# Altium PCB Ultrasonic main.PcbDoc
Units mm, origin at the board's own origin, x right, y up, seen from the top; angles counter-clockwise.
Board outline 47.8 x 79.1 mm, 2 copper layers (Top Layer, Bottom Layer), stack 1.621 mm thick; 35 components, 34 nets, 151 pads, 6 vias.
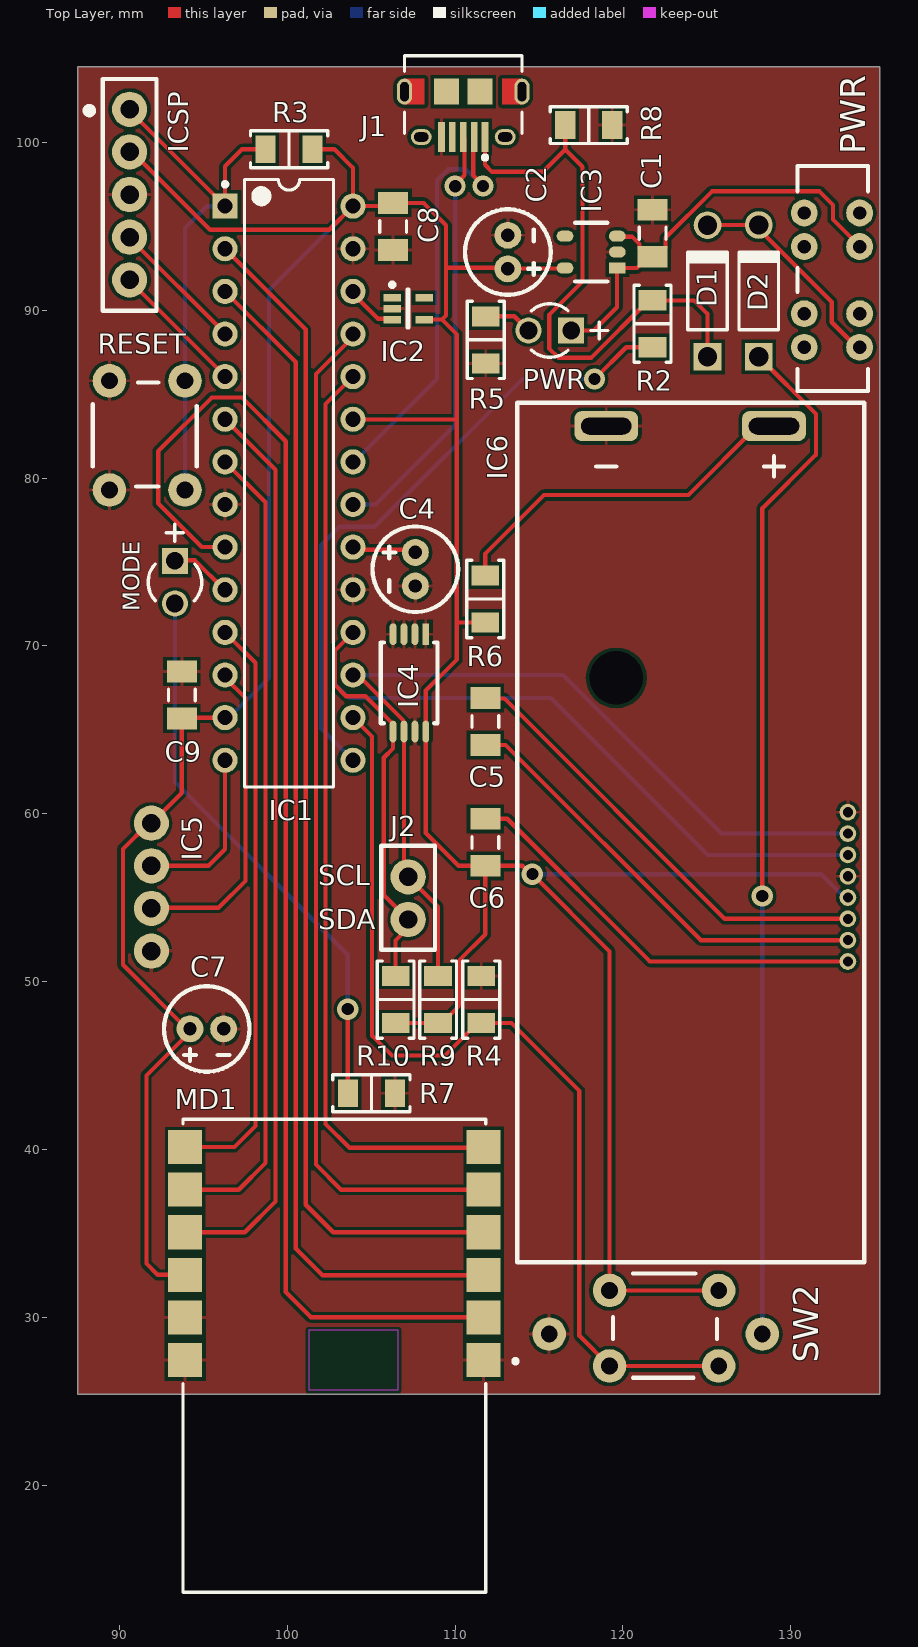
[diagram p0: Top Layer view]
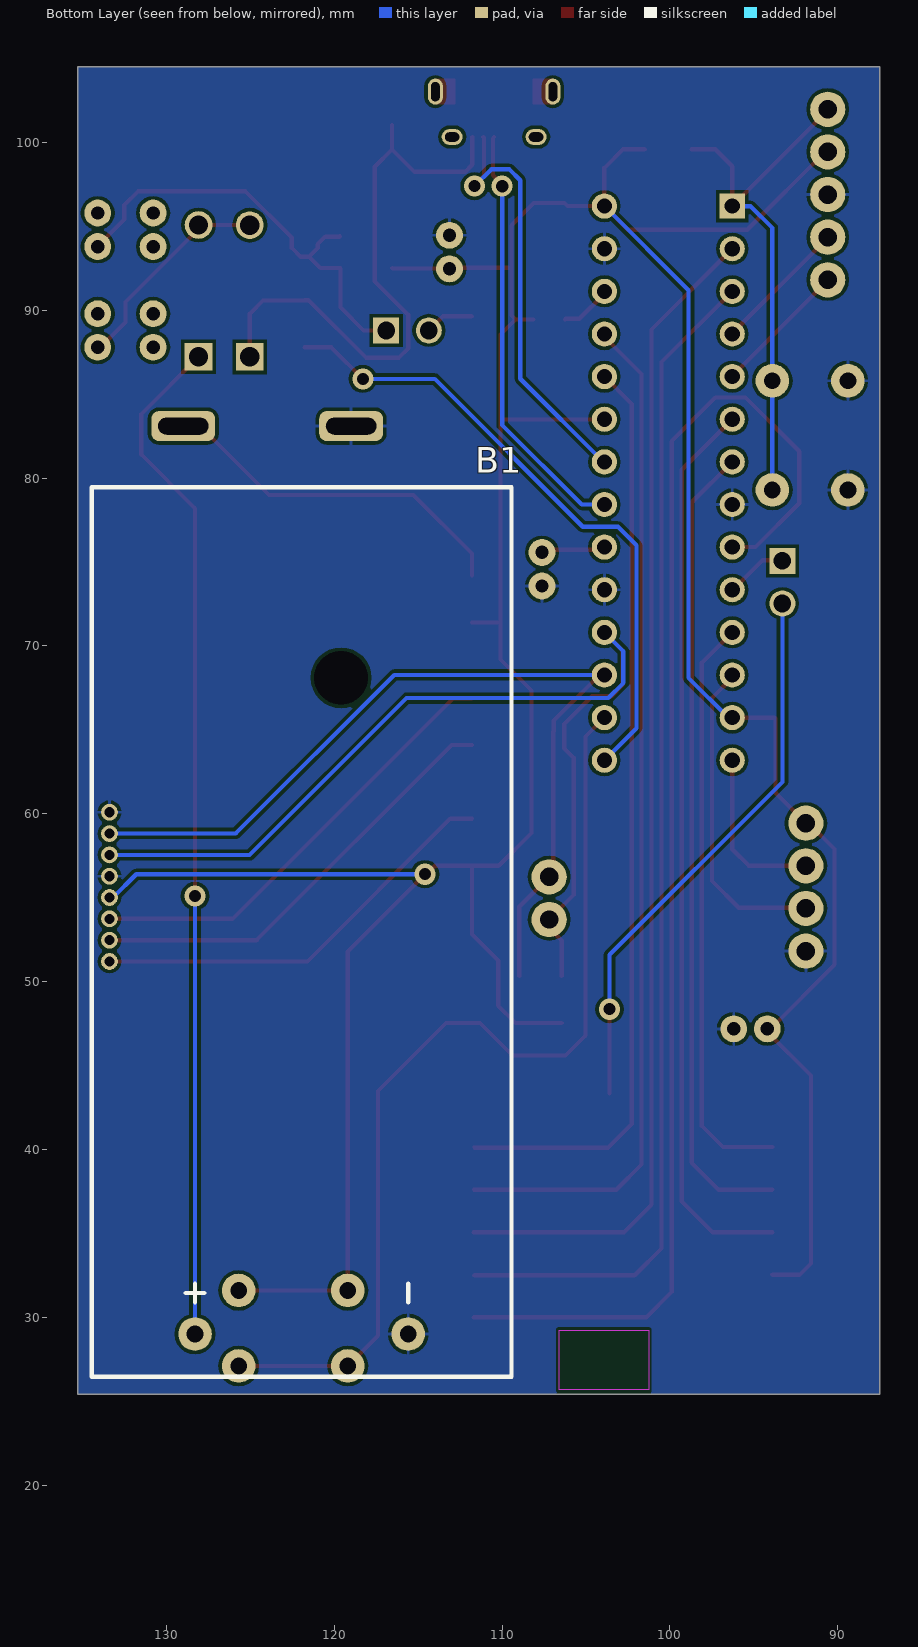
[diagram p1: Bottom Layer view, seen from below]

## Layer stack, top to bottom
Top Solder: solder mask 0.0102, Solder Resist, Dk 3.5
Top Layer: signal copper 0.0356
Dielectric 1: dielectric 1.55, FR-4, Dk 4.8
Bottom Layer: signal copper 0.0356
Bottom Solder: solder mask 0.0102, Solder Resist, Dk 3.5

## Board outline
87.5,25.4 135.3,25.4 135.3,104.5 87.5,104.5

## Design rules (kind name [scope] priority, off if disabled: settings)
BoardOutlineClearance [All] p1 off: gap=0.25 ignorepadtopadclearanceinfootprint=FALSE except(0: Arc-SplitContinuation Track-SplitContinuation SMDPad-SplitContinuation THPad-SplitContinuation Via-SplitContinuation Fill-SplitContinuation Poly-SplitContinuation Region-SplitContinuation Text-SplitContinuation)
Clearance Clearance-xPP-xTP-xTT [All] p1: gap=0.2 ignorepadtopadclearanceinfootprint=FALSE except(0: Arc-Hole Track-Hole SMDPad-Hole THPad-Hole Via-Hole Fill-Hole Poly-Hole Region-Hole Text-Hole; 0.25: Arc-Arc Arc-Track Track-Track)
ComponentClearance [All] p1: gap=0.25 collisioncheckmode=3 verticalgap=0.25 showdistances=FALSE
DiffPairsRouting DiffPair_DiffPairsRouting [InDifferentialPair ('D')] p1: maxlimit=20 minlimit=0.254 mostfreqgap=0.254 toplayer_minwidth=0.381 toplayer_maxwidth=0.381 toplayer_prefwidth=0.381 bottomlayer_minwidth=0.381 bottomlayer_maxwidth=0.381 bottomlayer_prefwidth=0.381 maxuncoupledlength=12.7
DiffPairsRouting DiffPair_DiffPairsRouting_1 [InDifferentialPair ('D')] p2: maxlimit=0.254 minlimit=0.254 mostfreqgap=0.254 toplayer_minwidth=0.254 toplayer_maxwidth=0.381 toplayer_prefwidth=0.254 bottomlayer_minwidth=0.254 bottomlayer_maxwidth=0.381 bottomlayer_prefwidth=0.254 maxuncoupledlength=12.7
DiffPairsRouting DiffPairsRouting_1 [InDifferentialPair ('D')] p3: maxlimit=0.254 minlimit=0.254 mostfreqgap=0.254 toplayer_minwidth=0.381 toplayer_maxwidth=0.381 toplayer_prefwidth=0.381 bottomlayer_minwidth=0.381 bottomlayer_maxwidth=0.381 bottomlayer_prefwidth=0.381 maxuncoupledlength=12.7
DiffPairsRouting [All] p4: maxlimit=0.25 minlimit=0.25 mostfreqgap=0.25 toplayer_minwidth=0.381 toplayer_maxwidth=0.381 toplayer_prefwidth=0.381 bottomlayer_minwidth=0.381 bottomlayer_maxwidth=0.381 bottomlayer_prefwidth=0.381 maxuncoupledlength=12.5
Height [All] p1: minheight=0 maxheight=25 prefheight=12.5
HoleSize HoleSize-PTH [All] p1: absolutevalues=TRUE maxlimit=5 minlimit=0.25 maxpercent=80.000 minpercent=20.000
HoleToHoleClearance [All] p1: gap=0.35 allowstackedmicrovias=TRUE
MatchedLengths DiffPair_MatchedLengths [InDifferentialPair ('D')] p1: tolerance=25.4 checknetsindiffpair=FALSE checkdiffpairvsdiffpair=TRUE checkxsignals=TRUE checkothers=TRUE
MatchedLengths DiffPair_MatchedLengths_1 [InDifferentialPair ('D')] p2: tolerance=25.4 checknetsindiffpair=FALSE checkdiffpairvsdiffpair=TRUE checkxsignals=TRUE checkothers=TRUE
MatchedLengths [InDifferentialPair ('D')] p3: tolerance=25.4 checknetsindiffpair=FALSE checkdiffpairvsdiffpair=TRUE checkxsignals=TRUE checkothers=TRUE
MinimumAnnularRing "Minimum IAR  >0.45mm" [((ObjectKind = 'Pad') OR (ObjectKind = 'Via')) And (Layer = 'MultiLayer') And (HoleDiameter > AsMM(0.45))] p1: minimumring=0.175 // minimum inner annular ring for pads > 0.45mm finished hole size
MinimumAnnularRing "Minimum IAR <=0.45mm" [((ObjectKind = 'Pad') OR (ObjectKind = 'Via')) And (Layer = 'MultiLayer') And (HoleDiameter <= AsMM(0.45))] p2: minimumring=0.175 // minimum inner annular ring for pads <= 0.45mm finished hole size
MinimumSolderMaskSliver [All] p1: minsoldermaskwidth=0.08
PlaneClearance PlaneClearance-IPI [All] p1: clearance=0.25
PlaneConnect [All] p1: planeconnectstyle=Relief reliefexpansion=0.175 reliefentries=4 reliefconductorwidth=0.2 reliefairgap=0.2
PolygonConnect PolygonConnect-xTW [All] p1: connectstyle=Relief reliefconductorwidth=0.2 reliefentries=4 polygonreliefangle="90 Angle" airgapwidth=0.2
RoutingCorners [All] p1: cornerstyle=45-Degree minsetback=2.5 maxsetback=2.5
RoutingVias "RoutingVias > 0.45mm" [(ObjectKind = 'Via') And (HoleDiameter > AsMM(0.45))] p1: holewidth=0.5 width=0.85 viastyle="Through Hole" minholewidth=0.5 minwidth=0.85 maxholewidth=0.9 maxwidth=1.25 // finishet hole size > 0.45mm
RoutingVias "RoutingVias <= 0.45mm" [(ObjectKind = 'Via') And (HoleDiameter <= AsMM(0.45))] p2: holewidth=0.3 width=0.65 viastyle="Through Hole" minholewidth=0.25 minwidth=0.6 maxholewidth=0.45 maxwidth=0.8 // finishet hole size <= 0.45mm
SilkToSilkClearance [All] p1: silktosilkclearance=0.2
SilkToSolderMaskClearance SilkscreenOverComponentPads [IsPad] p1: minsilkscreentomaskgap=0.1 clearancetoexposedcopper=TRUE
SolderMaskExpansion [All] p1: expansion=0 istentingtop=FALSE
UnRoutedNet [All] p1: checkbadconnections=TRUE
Width Width-xTW [All] p1: maxlimit=1.5 minlimit=0.15 preferedwidth=0.2
18 further rules are at their usual default settings.

## Classes and differential pairs
differential pair D: +D_P -D_N

## Components (designator, comment, footprint, x,y, rotation, side; value= is the part's Value field where it differs from the comment)
B1 "BAT" MP000342 115.6,29 r270 bottom
C1 "1uF" 1206 121.76,94.59 r270 top
C2 "100uF" "THT CAP POL 5mm" 113.14,92.47 r90 top
C4 "10uF" "THT CAP POL 5mm" 107.628,75.573 r270 top
C5 "1uF" 1206 111.8,65.5 r270 top
C6 "1uF" 1206 111.8,58.3 r90 top
C7 "10uF" "THT CAP POL 5mm" 94.2,47.182 r0 top
C8 "0.1uF" 1206 106.3,95 r90 top
C9 "0.1uF" 1206 93.715,67.085 r270 top
D1 "1N5817" DIOD-DO-41-P-2 125.04,91.15 r90 top
D2 "1N5817" DIOD-DO-41-P-2 128.09,91.16 r90 top
IC1 "PIC24FJ64GB002-I/SP" SPDIP300-SP28 100.1,79.7 r0 top
IC2 "MCP9700T-E/LT" SC70-LT5_M 107.2,90.1 r0 top
IC3 "MIC5365-3.3YD5-TR" TSOT-23-5 119.66,92.52 r180 top
IC4 "M24256-BRDW6TP" "TSSOP8 DW" 108.25,70.7 r270 top
IC5 "RCWL1601" RCWL-1601 91.9,59.44 r270 top
IC6 "MCCOG21605B6W-SPTLYI" "LCD MCCOG21605B6W-SPTLYI" 133.4,51.2 r90 top
ICSP "5 PIN CON" "5 PIN CON" 90.6,101.98 r270 top (schematic designator J3)
J1 "10118194-0001LF" FCI-10118194-0001LF-5_V 110.48,101.68 r180 top
J2 "2 PIN CON" "2 PIN CON" 107.2,53.7 r90 top
MD1 "MRF89XAM8A-I/RM" FP-MRF89XAM8A-I-RM-0 102.8,27.7 r180 top
MODE "MODE" KING-L-934GD 93.3,73.8 r270 top (schematic designator LED2)
PWR "STSSS2232" STSSS2232 130.8,87.8 r90 top (schematic designator SW3)
PWR "PWR" KING-L-934GD 115.64,88.8 r180 top (schematic designator LED1)
R2 "100k" "RES 1206_3216" 121.76,89.2 r270 top value="100 kOhms"
R3 "10k" "RES 1206_3216" 100.1,99.6 r0 top value="10 kOhms"
R4 "1k" "RES 1206_3216" 111.55,48.93 r270 top value="100 kOhms"
R5 "220" "RES 1206_3216" 111.82,88.24 r90 top value="1 MOhms"
R6 "100" "RES 1206_3216" 111.8,72.8 r270 top value="1 MOhms"
R7 "100" "RES 1206_3216" 105.01,43.35 r180 top value="1 MOhms"
R8 "100k" "RES 1206_3216" 117.96,101.04 r180 top value="10 kOhms"
R9 "4k7" "RES 1206_3216" 108.98,48.93 r90 top value="4.7 kOhms"
R10 "4k7" "RES 1206_3216" 106.45,48.93 r270 top value="4.7 kOhms"
RESET "RESET" FSM4JH 89.4,79.3 r90 top (schematic designator SW1)
SW2 "MEASURE" FSM4JH 119.2,31.6 r0 top

## Footprints (in the part's own frame and the unit in brackets; to place one, negate y for a bottom-side part, rotate by r counter-clockwise, add the part's x,y. Pads: shape width x height; smd on the part's side, far side on the other; paste and mask are expansions set on the pad)
"2 PIN CON" [mm]
  round 2.1 hole 1.1 mask+0.1: 1(0,0)
  round 2.1 hole 1.1 mask+0.102: 2(2.54,0)
  silkscreen extent -1.8,-1.6 4.4,1.6, body extent -1.2,-1.2 3.74,1.2, height 5.5
"5 PIN CON" [mm]
  round 2.1 hole 1.1 mask+0.102: 1(0,0) 2(2.54,0) 3(5.08,0) 4(7.62,0) 5(10.16,0)
  silkscreen extent -1.8,-1.6 12,1.6, body extent -1.2,-1.2 11.36,1.2, height 5.5
1206 [mm] "Chip Resistor, 2-Leads, Body 3.20x1.60mm, IPC Medium Density"
  rect 1.3x1.8 smd: 1(-1.4,0) 2(1.4,0)
  silkscreen extent -0.35,-0.8 0.35,0.8, body extent -1.7,-0.9 1.7,0.9, height 0.9
DIOD-DO-41-P-2 [mm] "THD, 2-Leads, Body 4.635x2.36mm, Pin Spacing 7.85mm"
  rect 1.65x1.65 hole 1.15: 1(-3.925,0)
  round 1.65 hole 1.15: 2(3.925,0)
  silkscreen extent -2.32,-1.18 2.32,1.18, body extent -4.36,-1.18 4.36,1.18, height 2.35
FCI-10118194-0001LF-5_V [mm] "SMD, 5-Leads, Body 7x5mm, Pitch 0.65 mm"
  rect 0.4x1.8 smd: 1(-1.3,1.35) 2(-0.65,1.35) 3(0,1.35) 4(0.65,1.35) 5(1.3,1.35)
  oval 1.25x0.95 hole 0.55 slot 0.85 at 0 deg: 6(-2.5,1.35) 7(2.5,1.35)
  oval 0.9x1.55 hole 0.5 slot 1.15 at 90 deg: 8(-3.5,-1.35) 9(3.5,-1.35)
  rect 1.5x1.55 smd: 10(-1,-1.35) 11(1,-1.35)
  Top Layer region: 3.5,-2.125 3.5,-0.575 2.3,-0.575 2.3,-2.125
  Top Layer region: -2.3,-2.125 -2.3,-0.575 -3.5,-0.575 -3.5,-2.125
  silkscreen extent -3.5,-3.5 3.5,2.7, body extent -4.02,-4.03 4.02,1.55, height 2.72
FP-MRF89XAM8A-I-RM-0 [mil]
  rect 80x80 smd paste+0 mask+0: 1(-350,10) 2(-350,-90) 3(-350,-190) 4(-350,-290) 5(-350,-390) 6(-350,-490) 7(350,-490) 8(350,-390) 9(350,-290) 10(350,-190) 11(350,-90) 12(350,10)
  Keep-Out Layer region: -150,-60 60,-60 60,80 -150,80
  silkscreen extent -430,-555 355,555, body extent -394,-559 394,559, height 10
FSM4JH [mm] "Tactile switch"
  round 2 hole 1: 1(0,0) 2(6.5,0) 3(0,-4.5) 4(6.5,-4.5)
  silkscreen extent 0.2,-5.2 6.4,1, body extent 0.3,-5.1 6.3,0.9, height 5.5
KING-L-934GD [mm] "THD, 2-Leads, Dia 3.2mm, Body Length 4.9mm"
  rect 1.55x1.55 hole 1.05: 1(-1.27,0)
  round 1.55 hole 1.05: 2(1.27,0)
  silkscreen extent -3.46,-1.6 1.1,1.6
"LCD MCCOG21605B6W-SPTLYI" [mm] "16x2"
  round 1 hole 0.6 mask+0.05: 1(0,0) 2(1.27,0) 3(2.54,0) 4(3.81,0) 5(5.08,0) 6(6.35,0) 7(7.62,0) 8(8.89,0)
  rrect50% 1.8x3.8 hole 1 slot 3 at 90 deg mask+0.102: 9(31.9,4.4) 10(31.9,14.4)
  silkscreen extent -17.92,-0.98 33.3,19.7
MP000342 [mm] "Battery holder 2xAAA"
  round 2 hole 1 mask+0.102: 1(0,0) 2(0,-12.7)
  round 0 hole 3.2 unplated mask+0.102: 3(-39.1,-4)
  silkscreen extent -50.45,-18.85 2.55,6.15, body extent -50,-18.5 2,5.5, height 12
RCWL-1601 [mm] "Ultrasonic distance sensor"
  round 2.1 hole 1.1 mask+0.102: 1(0,0) 2(2.54,0) 3(5.08,0) 4(7.62,0)
  body extent -16.2,-9.1 23.8,0.5, height 18
"RES 1206_3216" [mm] "Chip Resistor, 2-Leads, Body 3.13x1.55mm, IPC Medium Density"
  rect 1.2x1.65 smd: 1(-1.4,0) 2(1.4,0)
  silkscreen extent -2.3,-1.1 2.3,1.1, body extent -1.57,-0.8 1.62,0.8, height 0.6
SC70-LT5_M [mm] "SOT353, 5-Leads, Body 2x1.3mm, Pitch 0.65mm, Lead Span 2.1mm, IPC Low Density"
  rect 1.05x0.45 smd: 1(-0.95,0.65) 2(-0.95,0) 3(-0.95,-0.65) 4(0.95,-0.65) 5(0.95,0.65)
  silkscreen extent -1.07,-1.15 0.05,1.55, body extent -0.67,-1.12 0.68,1.13, height 1.1
SPDIP300-SP28 [mm] "DIP, 28-Pin, Row Spacing 7.62 mm, Pitch 2.54 mm"
  rect 1.5x1.5 hole 0.9: 1(-3.81,16.51)
  round 1.5 hole 0.9: 2(-3.81,13.97) 3(-3.81,11.43) 4(-3.81,8.89) 5(-3.81,6.35) 6(-3.81,3.81) 7(-3.81,1.27) 8(-3.81,-1.27) 9(-3.81,-3.81) 10(-3.81,-6.35) 11(-3.81,-8.89) 12(-3.81,-11.43) 13(-3.81,-13.97) 14(-3.81,-16.51) 15(3.81,-16.51) 16(3.81,-13.97) 17(3.81,-11.43) 18(3.81,-8.89) 19(3.81,-6.35) 20(3.81,-3.81) 21(3.81,-1.27) 22(3.81,1.27) 23(3.81,3.81) 24(3.81,6.35) 25(3.81,8.89) 26(3.81,11.43) 27(3.81,13.97) 28(3.81,16.51)
  silkscreen extent -3.93,-18.1 2.65,18.1, body extent -3.55,-18.1 3.55,18.1, height 5.33
STSSS2232 [mm] "Slide switch 3POS"
  round 1.6 hole 0.8 mask+0.102: 1(0,-3.3) 2(2,-3.3) 3(6,-3.3) 4(8,-3.3) 5(0,0) 6(2,0) 7(6,0) 8(8,0)
  silkscreen extent -2.6,-3.8 10.8,0.4, body extent -2.4,-5.4 10.6,0.3, height 3.5
"THT CAP POL 5mm" [mm]
  round 1.6 hole 0.8 mask+0.102: 1(0,0) 2(2,0)
  silkscreen extent -1.55,-2.55 3.55,2.55, body extent -1.5,-2.5 3.5,2.5, height 8.5
TSOT-23-5 [mm]
  rect 1x0.66 smd: 1(0,0)
  oval 1x0.66 smd: 2(0,-0.95) 3(0,-1.9) 4(3.115,-1.9) 5(3.115,0)
  silkscreen extent 0.6,-2.7 2.5,0.8, body extent 0.65,-2.4 2.45,0.5, height 1
"TSSOP8 DW" [mm]
  rect 1.3x0.4 smd: 1(0,0)
  oval 1.3x0.4 smd: 2(0,-0.65) 3(0,-1.3) 4(0,-1.95) 5(5.8,-1.95) 6(5.8,-1.3) 7(5.8,-0.65) 8(5.8,0)
  silkscreen extent 0.49,-2.69 5.3,0.7, body extent 0.7,-2.5 5.1,0.5, height 1.2

## Part data
C1 C5 C6 C8 C9: library part MCGPR50V105M5X11, "MCGPR50V105M5X11"
C2 C4 C7: library part "CAP POL", "Capacitor"
D1 D2: library part CMP-2000-05521-1, "Schottky Barrier Rectifier, 1 A, 20 V, -65 to 125 degC, 2-Pin DO-41, RoHS, Tape and Reel", If - Forward Current=1A, Ifsm - Forward Surge Current=25A, Ir - Reverse Current=1000uA, Manufacturer=DiodesIncorporated, Maximum Operating Temperature=+125C, Minimum Operating Temperature=-65C, Operating Temperature Range=-65Cto+125C, Package / Case=DO-41, Package Description="2-Pin Through Hole Device, Body 4.635 x 2.36 mm, Pin Spacing 7.85 mm", Package Reference=DO-41-P-2, Vf - Forward Voltage=0.75Vat3A, Vrrm - Repetitive Reverse Voltage=20V, Brand=DiodesIncorporated, Configuration=Single, Datasheet URL=http://www.diodes.com/_files/datasheets/ds23001.pdf, Datasheet Version="Rev. 8-2, 05/2009", Factory Pack Quantity=5000, Height=2.72mm, Length=5.21mm, Manufacturer URL=http://www.diodes.com/, Mounting Style=ThroughHole, Mounting Technology=ThroughHole, Packaging=Reel, Product=SchottkyRectifiers, Product Category=SchottkyDiodes&Rectifiers, RoHS=True, Series=1N58, Technology=Si, Termination Style=ThroughHole, Type=SchottkyDiode, Unit Weight=0.010582oz, Width=2.72mm
IC1: library part CMP-0046-00015-2, "16-Bit Flash Microcontroller with USB On-The-Go and nanoWatt XLP, 64KB Flash, 8KB SRAM, 28-Pin SPDIP, Industrial Temperature", ComponentLink1Description=Datasheet, ComponentLink1URL=http://ww1.microchip.com/downloads/en/DeviceDoc/39940d.pdf, ComponentLink2Description="Packaging Specification", ComponentLink2URL=http://www.microchip.com/stellent/groups/techpub_sg/documents/packagingspec/en012702.pdf, ComponentLink3Description="Microchip.com Home", ComponentLink3URL=http://www.microchip.com/, DatasheetVersion="revD, Aug-2010", PackageDescription="28-Lead Skinny Plastic Dual In-Line (SP) - 300 mil Body [SPDIP]", PackageReference=SPDIP300-SP28, PackageVersion="revBB, Aug-2009", RevisionNote="Component URLs added."
IC2: library part CMP-0192-00174-1, "Low-Power Linear Active Thermistor IC, 5-Pin SC-70, Extended Temperature, Tape and Reel", Code_IPC=SOT353-5, DatasheetVersion="revE, Apr-2009", PackageDescription="5-Lead Plastic Small Outline Transistor (LT) [SC70]", PackageReference=SC70-LT5, PackageVersion="revBB, Aug-2009"
IC3: "LDO Voltage regulator 2.5V-5.5V in 3.3V out"
IC4: "EEPROM 256kbit"
IC5: "Ultrasonic distance sensor"
IC6: "3V-5V 16x2 character LCD"
J1: library part CMP-2000-05120-1, "Micro USB B Type Receptacle, 1.8 A, -55 to 85 degC, 5-Pin SMD, RoHS, Tape and Reel", Manufacturer="Amphenol FCI", Package Description="5-Pin Surface Mount Device, Body 8.05 x 5.53 mm, Pitch 0.65 mm", Package Reference=10118194-0001LF-5, Body Orientation=RightAngle, Datasheet URL=https://datasheet.ciiva.com/26945/getdatasheetpartid-418619-26945695.pdf, Datasheet Version="Rev. A, 10/2011", Gender=RCP, Manufacturer URL=http://www.fci.com/, Mounting=SurfaceMount, Number of Contacts=5, Packaging=CutTape, Pitch=0.65mm, Rad Hard=No, Termination Method=Solder, Type=MicroUSBTypeB
MD1: library part CMP-06331-000001-1, "RF TXRX MOD ISM<1GHZ TRACE ANT", Ambient Temperature Range High=+85°C, Ambient Temperature Range Low=-40°C, Manufacturer=Microchip, Max Frequency=870MHz, Max Supply Voltage=3.6V, Min Supply Voltage=2.1V, Nominal Supply Current=1.3mA, Receiving Current=3mA, Temperature="-40°C to +85°C", Transmitting Current=25mA, Automotive=No, Bandwidth=7MHz, Category=UNK, ComponentLink2Description=Datasheet, ComponentLink2URL=http://ww1.microchip.com/downloads/en/DeviceDoc/70651A.pdf, Data Rate=40kbits/s, Device Class L1="Integrated Circuits (ICs)", Device Class L2="RF Semiconductors and Devices", Device Class L3=Transceivers, Digikey Description="RF TXRX MOD ISM<1GHZ TRACE ANT", Height=0.075inch, Interface=SPI, Lead Free=Yes, Manufacturer Part Number=MRF89XAM8A-I/RM, Mouser Description="RF Modules 868MHz Sub-GHz transceiver module", Octopart=https://octopart.com/mrf89xam8a-i%2Frm-microchip-18902547, Package=MRF89XAM8A-I/RM, RoHS=TRUE, Temperature Range High=+85°C, Temperature Range Low=-40°C
MODE PWR: library part CMP-2000-06531-1, "Green Diffused LED, 2.2 V, -40 to 85 degC, 2-Pin THD, RoHS", Forward Voltage=2.2V, LED Colours=Green, Manufacturer=Kingbright, Package Description="2-Pin Through Hole Device, Dia 3.2 mm, Body Length 4.9 mm", Package Reference=L-934GD, Package Type=3mm(T-1), Datasheet URL=https://datasheet.ciiva.com/11773/0900766b801ff775-11773480.pdf, Datasheet Version="Rev. 1, 09/2001", Dimensions=3x4.6mm, Dominant Wavelength=568nm, LED Material=GaP, Lens Colour=Green, Lens Shape=Round, Luminous Intensity=20mcd, Manufacturer URL=http://www.kingbright.com/, Mounting Technology=ThroughHole, Mounting Type=ThroughHole, Number of LEDs=1, Number of Pins=2, Series=Round, Viewing Angle=60°
PWR: "Sliding switch"
R2 R4: library part RNCS1206BKE100K, "RES 100K OHM 0.1% 1/8W 1206", Device Package="1206 (3216 Metric)", Manufacturer="Stackpole Electronics Inc", Operating Temperature="-55°C ~ 155°C", Power (Watts)="0.125W, 1/8W", Ratings=AEC-Q200, Resistance="100 kOhms", Supplier Device Package=1206, Supplier Part Number 1=RNCS1206BKE100KCT-ND, Temperature Coefficient=±25ppm/°C, Tolerance=±0.1%, ComponentLink1Description=Datasheet, ComponentLink1URL=https://www.seielect.com/catalog/sei-rncs_rnch.pdf, ComponentLink2Description="DigiKey Link", ComponentLink2URL=http://digikey.com/product-detail/en/stackpole-electronics-inc/RNCS1206BKE100K/RNCS1206BKE100KCT-ND/1800328, Composition="Thin Film", Features="Anti-Corrosive, Automotive AEC-Q200, Moisture Resistant", Height - Seated (Max)="0.026\" (0.65mm)", LastUpdated="2020-09-02 01:13:11", Lifecycle Status=Active, Minimum Order=1, Number of Terminations=2, Package / Case="1206 (3216 Metric)", Packaging=TapeAndReel, Part Number=RNCS1206BKE100K, Part Status=Active, PartId=26854, Price=0.10, Series=RNCS, Size / Dimension="0.120\" L x 0.061\" W (3.05mm x 1.55mm)", Supplier 1=DigiKey
R3: library part CRG1206F10K, "RES SMD 10K OHM 1% 1/4W 1206", Device Package="1206 (3216 Metric)", Manufacturer="TE Connectivity Passive Product", Operating Temperature="-55°C ~ 155°C", Power (Watts)="0.25W, 1/4W", Resistance="10 kOhms", Supplier Device Package=1206, Supplier Part Number 1=A106069CT-ND, Temperature Coefficient=±100ppm/°C, Tolerance=±1%, ComponentLink1Description=Datasheet, ComponentLink1URL=https://www.te.com/commerce/DocumentDelivery/DDEController?Action=srchrtrv&DocNm=1773204&DocType=DS&DocLang=English, ComponentLink2Description="DigiKey Link", ComponentLink2URL=http://digikey.com/product-detail/en/te-connectivity-passive-product/CRG1206F10K/A106069CT-ND/3477720, Composition="Thick Film", Height - Seated (Max)="0.026\" (0.65mm)", LastUpdated="2020-09-02 01:13:10", Lifecycle Status=Active, Minimum Order=1, Number of Terminations=2, Package / Case="1206 (3216 Metric)", Packaging=TapeAndReel, Part Number=CRG1206F10K, Part Status=Active, PartId=26989, Price=0.01, Series="CRG, Neohm", Size / Dimension="0.122\" L x 0.061\" W (3.10mm x 1.55mm)", Supplier 1=DigiKey
R5 R6 R7: library part RT1206BRD071ML, "RES SMD 1M OHM 0.1% 1/4W 1206", Device Package="1206 (3216 Metric)", Manufacturer=Yageo, Operating Temperature="-55°C ~ 155°C", Power (Watts)="0.25W, 1/4W", Resistance="1 MOhms", Supplier Device Package=1206, Supplier Part Number 1=YAG2022CT-ND, Temperature Coefficient=±25ppm/°C, Tolerance=±0.1%, ComponentLink1Description=Datasheet, ComponentLink1URL=https://www.yageo.com/upload/media/product/productsearch/datasheet/rchip/PYu-RT_1-to-0.01_RoHS_L_11.pdf, ComponentLink2Description="DigiKey Link", ComponentLink2URL=http://digikey.com/product-detail/en/yageo/RT1206BRD071ML/YAG2022CT-ND/5139470, Composition="Thin Film", Height - Seated (Max)="0.026\" (0.65mm)", LastUpdated="2020-09-02 01:13:11", Lifecycle Status=Active, Minimum Order=1, Number of Terminations=2, Package / Case="1206 (3216 Metric)", Packaging=TapeAndReel, Part Number=RT1206BRD071ML, Part Status=Active, PartId=26858, Price=0.10, Series=RT, Size / Dimension="0.122\" L x 0.063\" W (3.10mm x 1.60mm)", Supplier 1=DigiKey
R8: library part CRG1206F10K, "RES SMD 100K OHM 1% 1/4W 1206", Device Package="1206 (3216 Metric)", Manufacturer="TE Connectivity Passive Product", Operating Temperature="-55°C ~ 155°C", Power (Watts)="0.25W, 1/4W", Resistance="10 kOhms", Supplier Device Package=1206, Supplier Part Number 1=A106069CT-ND, Temperature Coefficient=±100ppm/°C, Tolerance=±1%, ComponentLink1Description=Datasheet, ComponentLink1URL=https://www.te.com/commerce/DocumentDelivery/DDEController?Action=srchrtrv&DocNm=1773204&DocType=DS&DocLang=English, ComponentLink2Description="DigiKey Link", ComponentLink2URL=http://digikey.com/product-detail/en/te-connectivity-passive-product/CRG1206F10K/A106069CT-ND/3477720, Composition="Thick Film", Height - Seated (Max)="0.026\" (0.65mm)", LastUpdated="2020-09-02 01:13:10", Lifecycle Status=Active, Minimum Order=1, Number of Terminations=2, Package / Case="1206 (3216 Metric)", Packaging=TapeAndReel, Part Number=CRG1206F10K, Part Status=Active, PartId=26989, Price=0.01, Series="CRG, Neohm", Size / Dimension="0.122\" L x 0.061\" W (3.10mm x 1.55mm)", Supplier 1=DigiKey
R9 R10: library part CRG1206F4K7, "RES SMD 4.7K OHM 1% 1/4W 1206", Device Package="1206 (3216 Metric)", Manufacturer="TE Connectivity Passive Product", Operating Temperature="-55°C ~ 155°C", Power (Watts)="0.25W, 1/4W", Resistance="4.7 kOhms", Supplier Device Package=1206, Supplier Part Number 1=A106078CT-ND, Temperature Coefficient=±100ppm/°C, Tolerance=±1%, ComponentLink1Description=Datasheet, ComponentLink1URL=https://www.te.com/commerce/DocumentDelivery/DDEController?Action=srchrtrv&DocNm=1773204&DocType=DS&DocLang=English, ComponentLink2Description="DigiKey Link", ComponentLink2URL=http://digikey.com/product-detail/en/te-connectivity-passive-product/CRG1206F4K7/A106078CT-ND/3477735, Composition="Thick Film", Height - Seated (Max)="0.026\" (0.65mm)", LastUpdated="2020-09-02 01:13:10", Lifecycle Status=Active, Minimum Order=1, Number of Terminations=2, Package / Case="1206 (3216 Metric)", Packaging=TapeAndReel, Part Number=CRG1206F4K7, Part Status=Active, PartId=26987, Price=0.01, Series="CRG, Neohm", Size / Dimension="0.122\" L x 0.061\" W (3.10mm x 1.55mm)", Supplier 1=DigiKey
RESET SW2: library part SW_TACT, "Tactile switch"

## Via types
v1: diameter 1.27, hole 0.72, Top Layer to Bottom Layer, 3 vias
v2: diameter 1.25, hole 0.72, Top Layer to Bottom Layer, 2 vias
v3: diameter 1.25, hole 0.73, Top Layer to Bottom Layer, 1 vias

## Nets (pads, with @x,y where several pads share a name; then routed paths per layer and width w, separated by ;. In a path a pad name is that pad's centre, name@x,y a point inside that pad or via, vN(x,y) a via of type N, cw(c..) or ccw(c..) an arc to the next point about the centre after c; other vN are vias at no path point)
3V3: C2.1 C6.1 C7.1 C8.2 C9.2 IC1.13 IC1.23 IC1.28 IC2.4 IC3.5 IC4.8 IC5.1 IC6.4 ICSP.2 MD1.10 R3.2 R6.2 R9.1 R10.2 SW2.1 SW2.2 | length 229.7
  Top Layer w0.2: C9.2 C9.2@93.76,65.73
  Top Layer w0.254: ICSP.2 90.76,99.44 95.399,94.801 102.501,94.801 IC1.28 ; C9.2 93.715,61.255 IC5.1 91.74,59.44 90.2,57.9 90.2,51 94.018,47.182 C7.1 94.2,47 91.6,44.4 91.6,33.2 92.274,32.526 MD1.10 ; C9.2@93.76,65.73 IC1.13 ; R3.2 102.8,99.6 103.91,98.49 IC1.28 ; IC1.23 103.92,83.5 110.1,83.5 ; R10.2 R9.1 109.205,47.53 110.23,48.555 110.23,51.25 111.8,52.82 C6.1 ; IC2.4 109.21,89.45 ; R6.2 110.1,71.4 ; IC3.5 116.52,92.495 113.165,92.495 C2.1 113.07,92.54 109.45,92.54 ; SW2.2 SW2.1 119.2,51.8 v1(114.6,56.4) 114.5,56.4 114,56.9 C6.1 ; IC1.28 106.11,96.21 C8.2 108.12,96.4 109.45,95.07 109.45,92.54 ; 109.21,89.45 109.45,89.69 109.45,92.54 ; 109.21,89.45 110.1,88.56 110.1,83.5 ; 110.1,71.4 110.1,83.5 ; 110.1,71.4 110.1,69.2 108.25,67.35 IC4.8 108.25,58.85 110.2,56.9 C6.1
  Bottom Layer w0.254: IC1.13 96.53,65.73 98.9,68.1 98.9,91.2 IC1.28 ; v1(114.6,56.4) 131.8,56.4 133.19,55.01 IC6.4
D_N: IC1.22 J1.2 | length 25.5
  Top Layer w0.254: J1.2 111.08,100.28 111.08,98.042 111.65,97.472 v2(111.65,97.4)
  Bottom Layer w0.254: IC1.22@103.94,80.94 108.92,85.92 108.92,97.75 109.57,98.4 110.65,98.4 v2(111.65,97.4)
D_P: IC1.21 J1.3 | length 25.5
  Top Layer w0.254: v3(110,97.4) 110,97.495 110.552,98.047 110.552,100.258 J1.3
  Bottom Layer w0.254: IC1.21 105.26,78.43 110,83.17 v3(110,97.4)
ECHO: IC1.12 IC5.3 | length 19.1
  Top Layer w0.254: IC5.3 91.94,54.4 95.9,54.4 97.5,56 97.5,66.9 96.29,68.11 IC1.12
GND: B1.1 C1.1 C2.2 C4.2 C7.2 C8.1 C9.1 IC1.8 IC1.19 IC1.27 IC2.2 IC3.2 IC4.1 IC4.2 IC4.3 IC4.4 IC4.7 IC5.4 IC6.5 IC6.8 IC6.10 ICSP.3 J1.5 MD1.1 MD1.11 MD1.12 R4.1 R5.1 R7.1 R8.1 RESET.1 RESET.2
MCLR: IC1.1 ICSP.1 R3.1 RESET.3 RESET.4 | length 32
  Top Layer w0.2: ICSP.1@90.6,101.9 ICSP.1
  Top Layer w0.254: ICSP.1@90.6,101.9 IC1.1 96.29,98.59 97.3,99.6 R3.1 ; RESET.3@93.6,79.3 93.55,79.3 RESET.3@93.6,79.35
  Bottom Layer w0.2: IC1.1@96.28,96.2 IC1.1
  Bottom Layer w0.254: RESET.3 RESET.4 93.9,94.9 95.2,96.2 IC1.1@96.28,96.2
MISO: IC1.11 MD1.7 | length 34.9
  Top Layer w0.254: MD1.7 96.846,40.146 98.1,41.4 98.1,69 IC1.11
MOSI: IC1.25 MD1.5 | length 61
  Top Layer w0.254: IC1.25 103.91,88.41 101.7,86.2 101.7,39.1 103.2,37.6 MD1.5@111.684,37.6
nCS: IC1.7 MD1.8 | length 48.2
  Top Layer w0.254: MD1.8 93.916,37.6 97.1,37.6 98.7,39.2 98.7,78.56 IC1.7
nCSCON: IC1.3 MD1.3 | length 70.6
  Top Layer w0.254: IC1.3 100.5,86.92 100.5,34.1 102.1,32.5 MD1.3@111.664,32.5
NetB1_2: B1.2 D2.1 | length 61
  Top Layer w0.254: D2.1 131.5,83.825 131.5,81.4 128.3,78.2 v1(128.3,55.1)
  Bottom Layer w0.254: B1.2 v1(128.3,55.1)
NetC1_2: C1.2 IC3.1 IC3.3 PWR.1@116.91,88.8 PWR.3 | length 26.7
  Top Layer w0.254: PWR.1@116.91,88.8 118.26,88.8 119.64,90.18 119.64,92.5 IC3.1 120.84,92.52 C1.2@121.51,93.19 ; IC3.3 119.69,94.39 120.54,94.39 120.987,93.943 120.987,93.713 C1.2@121.51,93.19 ; PWR.3 134.1,93.83 132.52,95.41 132.52,96.27 131.7,97.09 125.3,97.09 122.533,94.323 122.533,93.713 122.01,93.19 C1.2 C1.2@121.51,93.19
NetC4_1: C4.1 IC1.20 | length 3.8
  Top Layer w0.254: IC1.20 104.069,75.731 107.469,75.731 C4.1
NetC5_1: C5.1 IC6.3 | length 27.1
  Top Layer w0.254: C5.1 111.832,66.868 112.932,66.868 126.06,53.74 IC6.3
NetC5_2: C5.2 IC6.2 | length 26.4
  Top Layer w0.254: C5.2 113,64.1 124.63,52.47 IC6.2
NetC6_2: C6.2 IC6.1 | length 25.1
  Top Layer w0.254: C6.2 113.1,59.7 121.6,51.2 IC6.1
NetD1_2: D1.2 D2.2 PWR.1@134.1,87.8 | length 12.9
  Top Layer w0.254: D1.2 125.045,95.08 128.085,95.08 D2.2 128.09,94.84 132.44,90.49 132.44,89.29 133.93,87.8 PWR.1@134.1,87.8
NetIC1_10: IC1.10 MODE.1 | length 3.7
  Top Layer w0.254: MODE.1 93.33,75.1 94.5,75.1 96.25,73.35 IC1.10
NetIC1_15: IC1.15 R2.2 | length 38.6
  Top Layer w0.254: v2@118.3,86.3 v2(118.3,85.91) 120.19,87.8 R2.2
  Bottom Layer w0.254: IC1.15 102,65.1 102,76 103.1,77.1 105.2,77.1 114.01,85.91 v2(118.3,85.91)
NetIC1_16: IC1.16 R4.2 SW2.3 SW2.4 | length 58.4
  Top Layer w0.254: IC1.16 105.04,64.6 105.04,46.78 106.23,45.59 109.385,45.59 111.325,47.53 113.35,47.53 117.4,43.48 117.4,28.9 SW2.3 SW2.4
NetIC6_9: IC6.9 R6.1 | length 21.6
  Top Layer w0.254: R6.1 111.8,75.5 115.3,79 123.9,79 128,83.1 IC6.9
NetLED1_2: PWR.2@114.37,88.8 R5.2 | length 2.9
  Top Layer w0.254: R5.2 111.83,89.65 113.52,89.65 114.34,88.83 114.34,88.8 PWR.2@114.37,88.8
NetLED2_2: MODE.2 R7.2 | length 33.5
  Top Layer w0.254: v1(103.6,48.36) 103.6,43.36 R7.2
  Bottom Layer w0.254: MODE.2 93.3,72.4 93.2,72.3 93.3,72.2 93.3,61.9 103.6,51.6 v1(103.6,48.36)
PGEC1: IC1.5 ICSP.5 | length 8.1
  Top Layer w0.2: ICSP.5@90.6,91.78 ICSP.5 ; IC1.5 IC1.5@96.29,86.09
  Top Layer w0.254: ICSP.5@90.6,91.78 IC1.5@96.29,86.09
PGED1: IC1.4 ICSP.4 | length 8.1
  Top Layer w0.2: ICSP.4@90.6,94.32 ICSP.4 ; IC1.4 IC1.4@96.29,88.63
  Top Layer w0.254: ICSP.4@90.6,94.32 IC1.4@96.29,88.63
"RF IRQ0": IC1.2 MD1.4 | length 70.2
  Top Layer w0.254: IC1.2 101.1,88.86 101.1,36.7 102.734,35.066 MD1.4
"RF IRQ1": IC1.6 MD1.9 | length 54
  Top Layer w0.254: MD1.9 97.466,35.066 99.3,36.9 99.3,80.5 IC1.6
"RF RST": IC1.9 MD1.2 | length 81.3
  Top Layer w0.254: IC1.9 96.28,75.9 94.9,75.9 92.3,78.5 92.3,81.6 95.5,84.8 97.3,84.8 99.9,82.2 99.9,31.5 101.4,30 111.676,30 MD1.2
SCL: IC1.17 IC4.6 IC6.7 J2.2 R9.2 | length 53.6
  Top Layer w0.254: IC1.17 104.202,68.27 106.922,65.55 106.922,64.928 IC4.6 106.95,56.49 J2.2 108.98,54.46 R9.2
  Bottom Layer w0.254: IC1.17 116.43,68.27 125.88,58.82 IC6.7
SCLK: IC1.24 MD1.6 | length 55.2
  Top Layer w0.2: MD1.6@111.644,40.1 MD1.6
  Top Layer w0.254: IC1.24 102.28,84.42 102.28,41.52 103.7,40.1 MD1.6@111.644,40.1
SDA: IC1.18 IC4.5 IC6.6 J2.1 R10.1 | length 62.5
  Top Layer w0.254: IC1.18 102.83,69.73 102.83,67.67 103.5,67 104.65,67 106.3,65.35 106.3,63.9 105.74,63.34 105.74,55.16 J2.1 107.2,53.2 106.45,52.45 R10.1
  Bottom Layer w0.254: IC1.18 102.779,69.679 102.779,67.802 103.681,66.9 115.7,66.9 125.05,57.55 IC6.6
TEMP: IC1.26 IC2.3 | length 3.1
  Top Layer w0.254: IC1.26 103.91,90.99 105.406,89.494 106.206,89.494 IC2.3
TRIG: IC1.14 IC5.2 | length 10.1
  Top Layer w0.254: IC5.2 95.3,56.9 96.29,57.89 96.29,63.17 96.3,63.18 IC1.14
VBUS: D1.1 J1.1 R2.1 R8.2 | length 35.7
  Top Layer w0.254: J1.1 111.78,98.67 112.2,98.25 115.22,98.25 116.56,99.59 ; R8.2 116.56,99.59 ; D1.1 125.04,89.79 124.25,90.58 121.78,90.58 R2.1 121.535,90.6 118.115,87.18 116.15,87.18 115.6,87.73 115.6,89.73 117.59,91.72 117.59,98.56 116.56,99.59
pads on no net: B1.3 IC2.1 IC2.5 IC3.4 J1.4 J1.6 J1.7 J1.8 J1.9 J1.10 J1.11 PWR.2@134.1,89.8 PWR.4 PWR.5 PWR.6 PWR.7 PWR.8

## Polygon pours and split planes (outlines as drawn)
GND on Bottom Layer "BOTTOM" (solid, pour order 1): 87.5,25.4 135.3,25.4 135.3,104.5 87.5,104.5
GND on Top Layer "TOP" (solid, pour order 0): 87.5,104.5 135.3,104.5 135.3,25.4 87.5,25.4

## Silkscreen, mask and mechanical layers (free items; w line width, h text height)
Top Overlay:
  circle w0.4: c88.2,101.9 r0.2
  text "SCL" at 101.851,55.742 h1.2
  text "SDA" at 101.833,53.127 h1.2
Mechanical 1:
  the board outline again, w0.254

## Text inside footprints (layer, text, board x,y; h text height)
J1: Mechanical 6 "PCB EDGE" at 117.68,104.58 h0.3 r180